# Altium PCB SHDN21-P01-V00.PcbDoc
Units mil, origin at the board's own origin, x right, y up, seen from the top; angles counter-clockwise.
Board outline 6000 x 4000 mil, 2 copper layers (Top Layer, Bottom Layer), stack 61.756 mil thick; 111 components, 82 nets, 355 pads, 24 vias.
Unrouted connection lines stored in the file: 51.
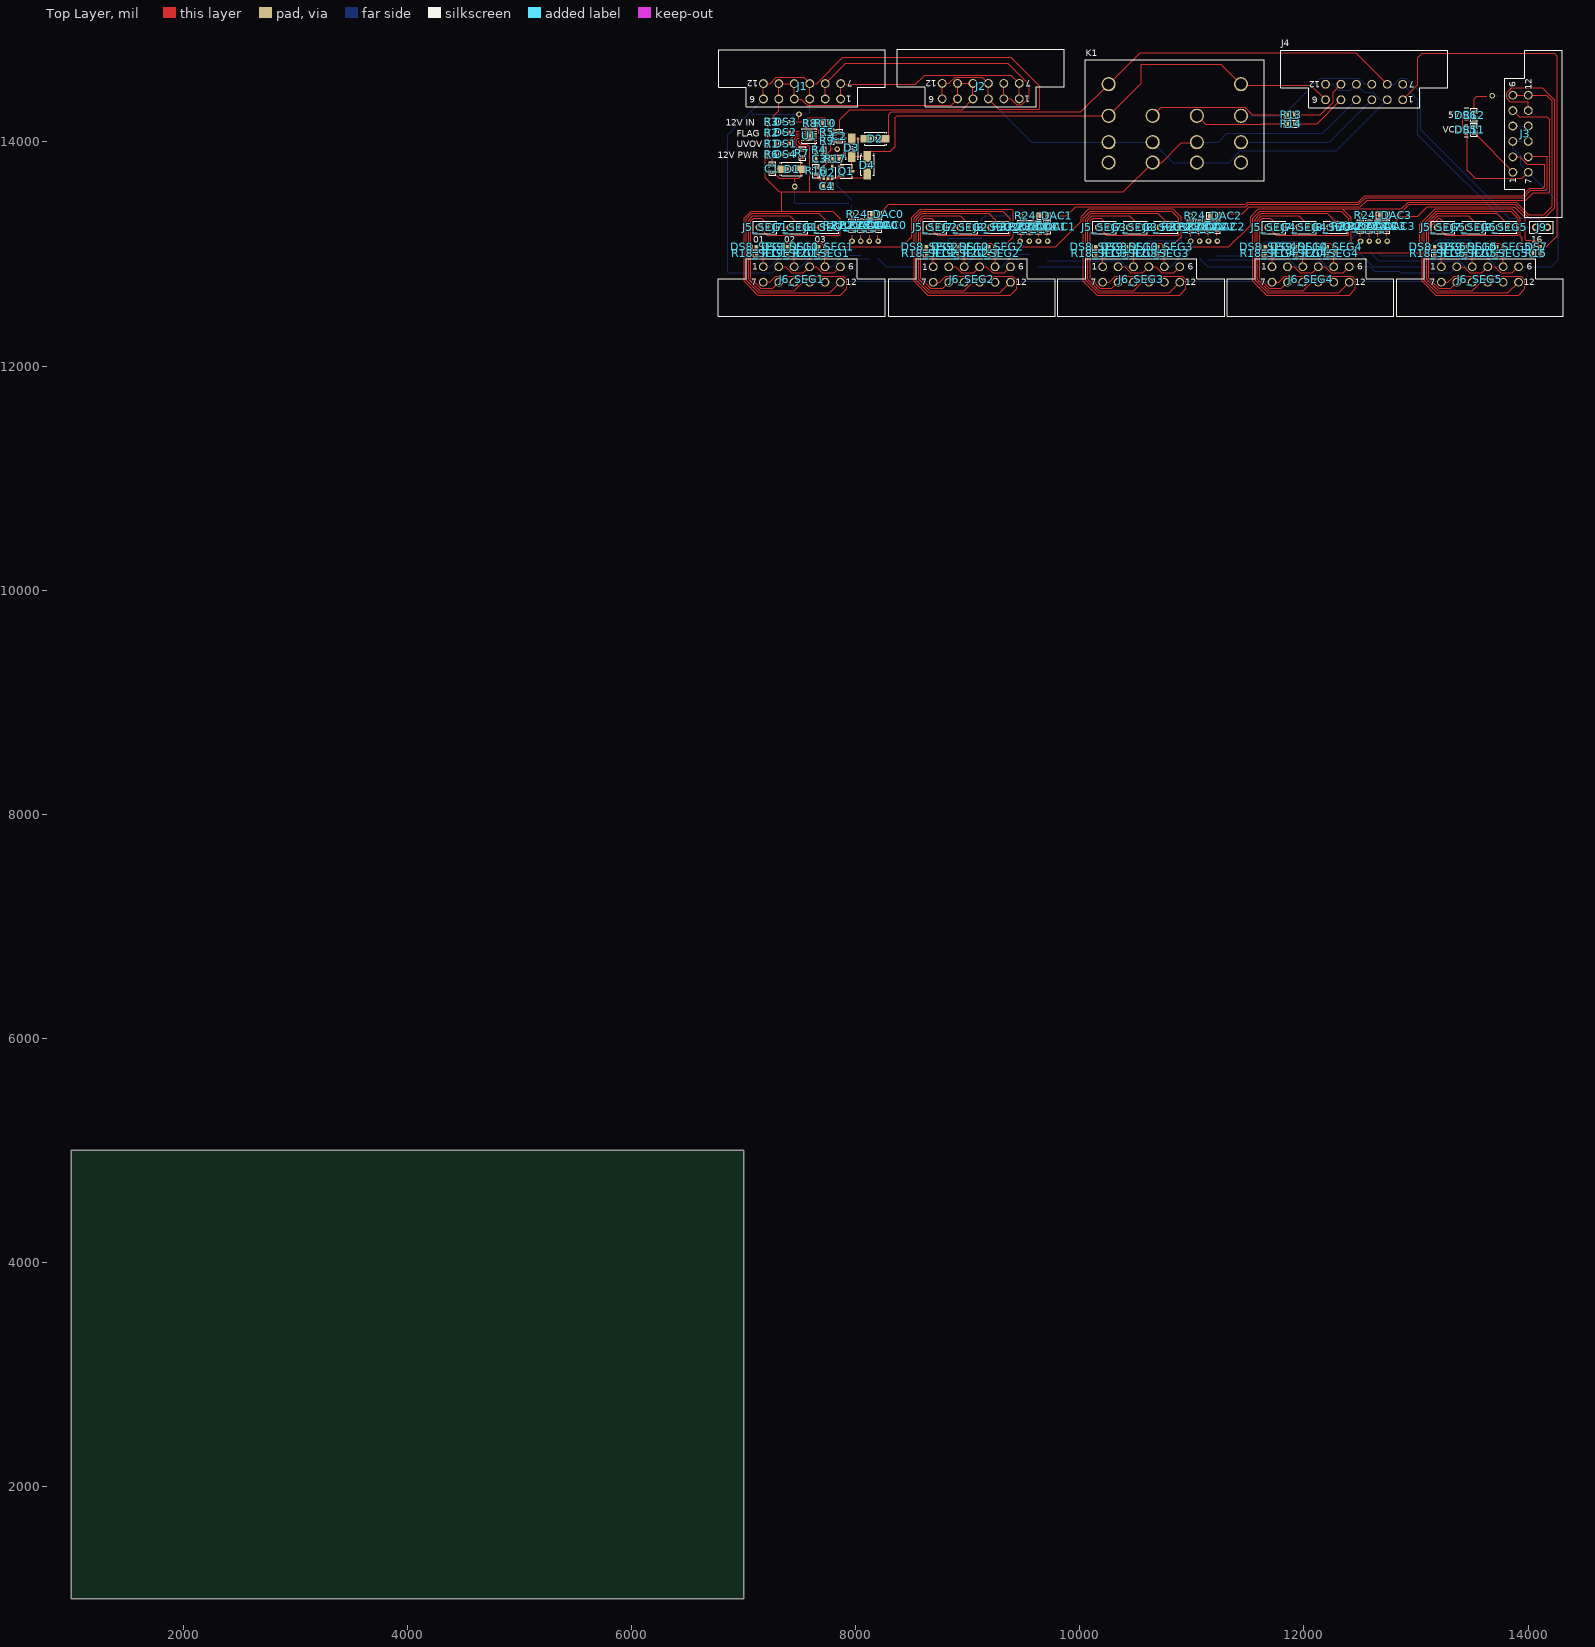
[diagram p0: Top Layer view]
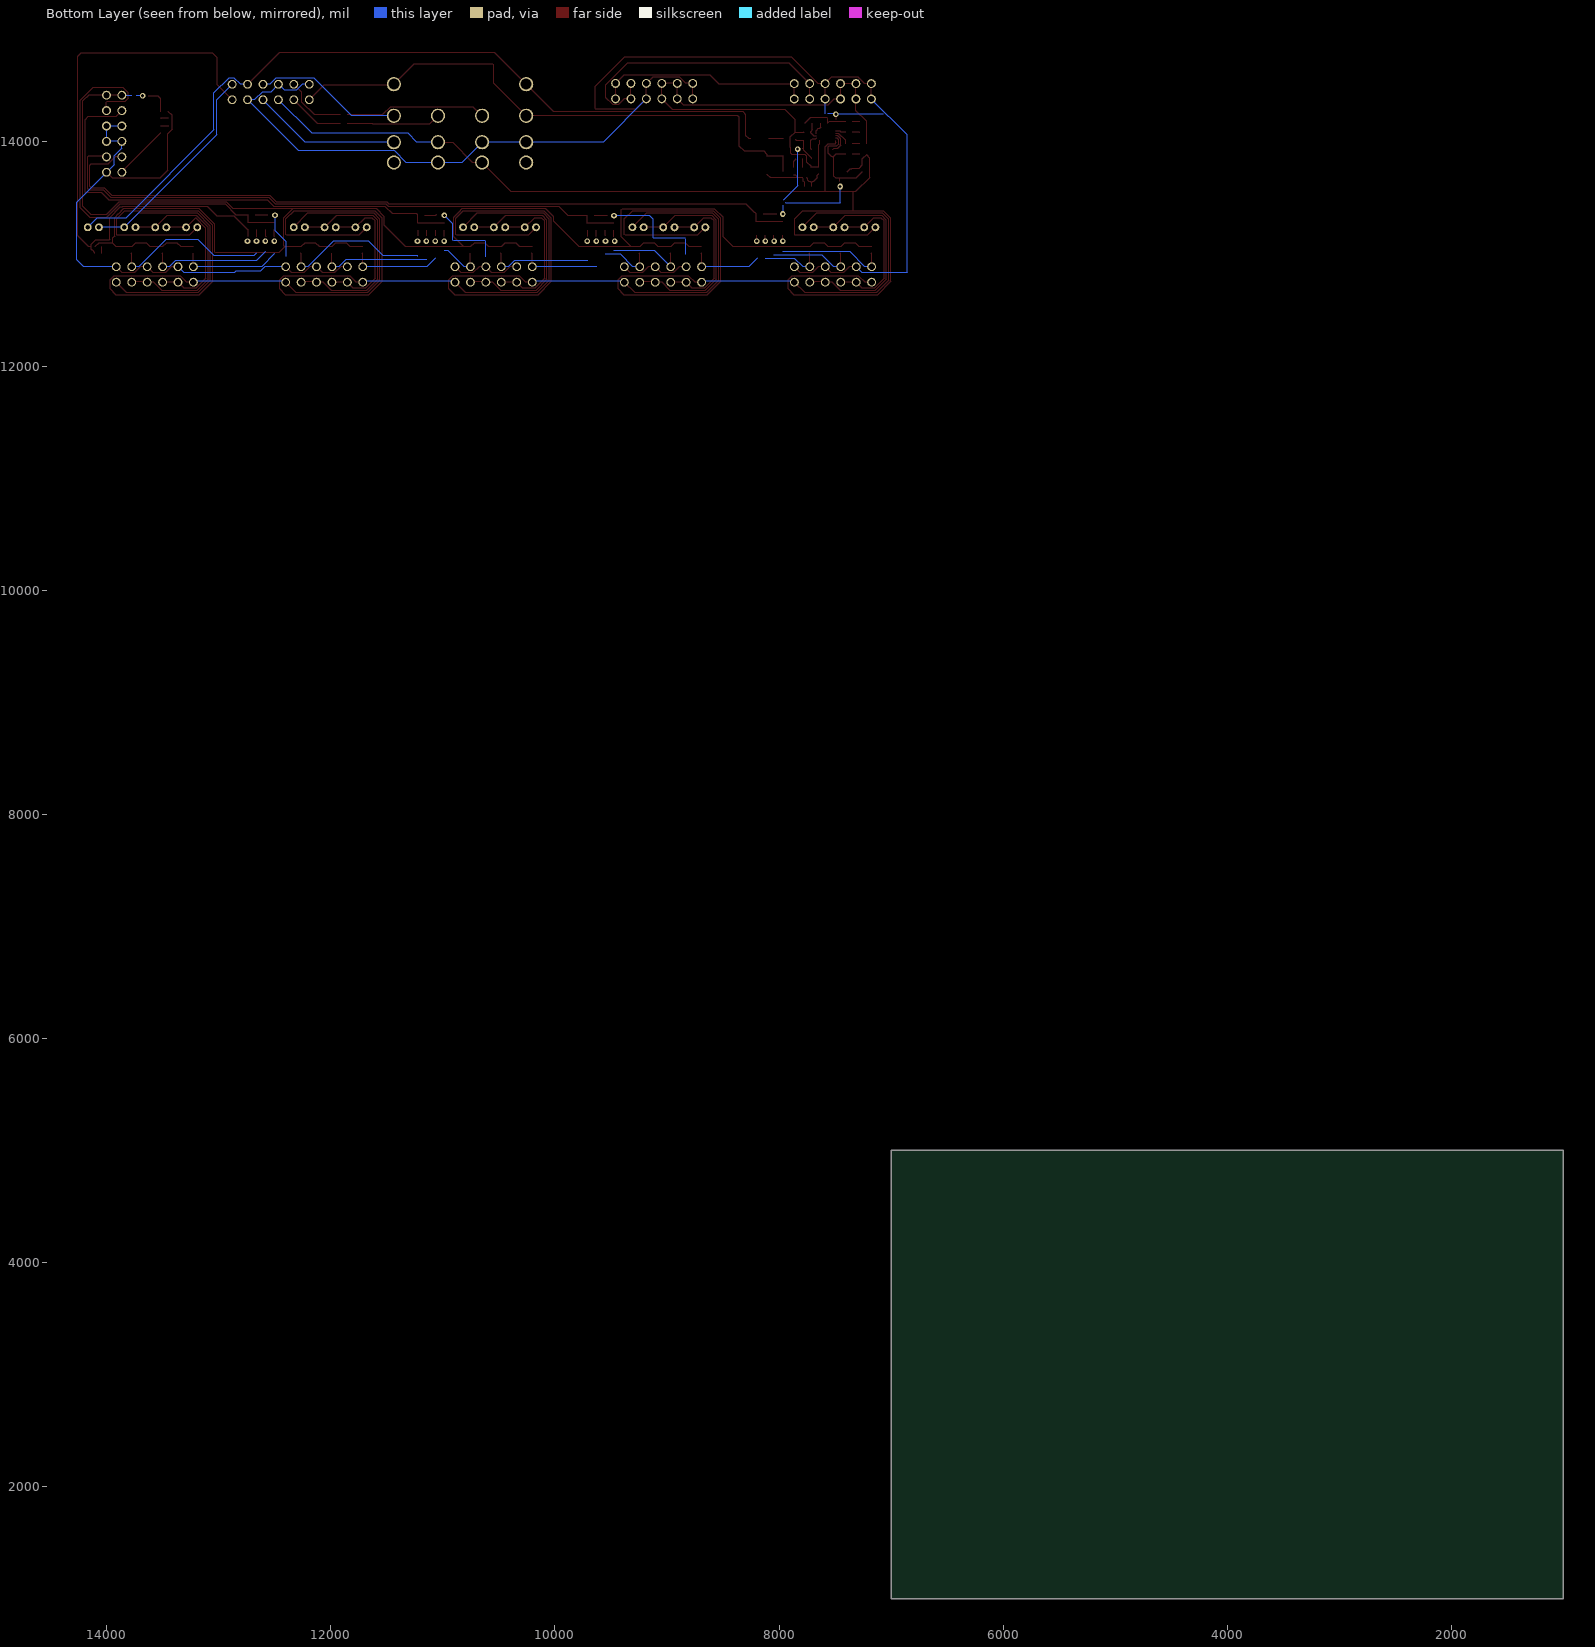
[diagram p1: Bottom Layer view, seen from below]

## Layer stack, top to bottom
Top Solder: solder mask 1, SM-001, Dk 4
Top Layer: signal copper 1.378
Dielectric 1: core 59, Core-043, Dk 4.3
Bottom Layer: signal copper 1.378
Bottom Solder: solder mask 1, SM-001, Dk 4

## Board outline
1000,1000 7000,1000 7000,5000 1000,5000

## Design rules (kind name [scope] priority, off if disabled: settings)
Clearance [All] p1: gap=10 ignorepadtopadclearanceinfootprint=FALSE except(0: Arc-Hole Track-Hole SMDPad-Hole THPad-Hole Via-Hole Fill-Hole Poly-Hole Region-Hole Text-Hole)
PolygonConnect [All] p1: connectstyle=Relief reliefconductorwidth=10 reliefentries=4 polygonreliefangle="90 Angle" airgapwidth=10
RoomDefinition SHDN21-S01-V00-Shutdown [InComponentClass('SHDN21-S01-V00-Shutdown')] p1: confinementstyle=ConfineIn formatcopy=TRUE lockcomponents=FALSE outline 6755.13,12961.61 14334.65,12961.61 14334.65,14846.14 6755.13,14846.14
RoomDefinition DAC2 [InComponentClass('DAC2')] p2: confinementstyle=ConfineIn formatcopy=TRUE lockcomponents=FALSE outline 10944.88,13174.47 11270.67,13174.47 11270.67,13381.89 10944.88,13381.89
RoomDefinition DAC0 [InComponentClass('DAC0')] p3: confinementstyle=ConfineIn formatcopy=TRUE lockcomponents=FALSE outline 7924.72,13184.57 8250.51,13184.57 8250.51,13391.99 7924.72,13391.99
RoomDefinition SEG1 [InComponentClass('SEG1')] p4: confinementstyle=ConfineIn formatcopy=TRUE lockcomponents=FALSE outline 6756.3,12418.31 8282.48,12418.31 8282.48,13411.42 6756.3,13411.42
RoomDefinition SEG2 [InComponentClass('SEG2')] p5: confinementstyle=ConfineIn formatcopy=TRUE lockcomponents=FALSE outline 8273.98,12418.06 9800.16,12418.06 9800.16,13411.17 8273.98,13411.17
RoomDefinition SEG3 [InComponentClass('SEG3')] p6: confinementstyle=ConfineIn formatcopy=TRUE lockcomponents=FALSE outline 9785.43,12418.31 11311.61,12418.31 11311.61,13411.42 9785.43,13411.42
RoomDefinition SEG4 [InComponentClass('SEG4')] p7: confinementstyle=ConfineIn formatcopy=TRUE lockcomponents=FALSE outline 11297.24,12418.31 12823.43,12418.31 12823.43,13411.42 11297.24,13411.42
RoomDefinition SEG5 [InComponentClass('SEG5')] p8: confinementstyle=ConfineIn formatcopy=TRUE lockcomponents=FALSE outline 12809.06,12418.31 14335.24,12418.31 14335.24,13411.42 12809.06,13411.42
RoomDefinition DAC3 [InComponentClass('DAC3')] p9: confinementstyle=ConfineIn formatcopy=TRUE lockcomponents=FALSE outline 12460.41,13176.7 12786.2,13176.7 12786.2,13384.12 12460.41,13384.12
RoomDefinition DAC1 [InComponentClass('DAC1')] p10: confinementstyle=ConfineIn formatcopy=TRUE lockcomponents=FALSE outline 9432.09,13171.52 9757.87,13171.52 9757.87,13378.94 9432.09,13378.94
RoutingVias [All] p1: holewidth=28 width=50 viastyle="Through Hole" minholewidth=28 minwidth=50 maxholewidth=28 maxwidth=50
SolderMaskExpansion [All] p1: expansion=4 istentingtop=FALSE
Width [All] p1: maxlimit=10 minlimit=10 preferedwidth=10
30 further rules are at their usual default settings.

## Classes and differential pairs
channel class SHDN21-S03-V00-DACResistors: DAC0 DAC1 DAC2 DAC3
channel class SHDN21-S02-V00-SegInterface: SEG1 SEG2 SEG3 SEG4 SEG5
component class SHDN21-S01-V00-Shutdown: C1 C2 C3 C4 D1 D2 D3 D4 D? DS1 DS2 DS3 DS4 DS5 DS6 DS7 J1 J2 J3 J4 J9 J? K1 Q1 R1 R2 R3 R4 R5 R6 R7 R8 R9 R10 R11 R12 R13 R14 R15 R16 R17 U1 U2
component class SEG5: DS8_SEG5 DS9_SEG5 DS10_SEG5 J5_SEG5 J6_SEG5 J7_SEG5 J8_SEG5 R18_SEG5 R19_SEG5 R20_SEG5
component class SEG4: DS8_SEG4 DS9_SEG4 DS10_SEG4 J5_SEG4 J6_SEG4 J7_SEG4 J8_SEG4 R18_SEG4 R19_SEG4 R20_SEG4
component class SEG3: DS8_SEG3 DS9_SEG3 DS10_SEG3 J5_SEG3 J6_SEG3 J7_SEG3 J8_SEG3 R18_SEG3 R19_SEG3 R20_SEG3
component class SEG2: DS8_SEG2 DS9_SEG2 DS10_SEG2 J5_SEG2 J6_SEG2 J7_SEG2 J8_SEG2 R18_SEG2 R19_SEG2 R20_SEG2
component class SEG1: DS8_SEG1 DS9_SEG1 DS10_SEG1 J5_SEG1 J6_SEG1 J7_SEG1 J8_SEG1 R18_SEG1 R19_SEG1 R20_SEG1
component class DAC3: R21_DAC3 R22_DAC3 R23_DAC3 R24_DAC3 R25_DAC3
component class DAC2: R21_DAC2 R22_DAC2 R23_DAC2 R24_DAC2 R25_DAC2
component class DAC1: R21_DAC1 R22_DAC1 R23_DAC1 R24_DAC1 R25_DAC1
component class DAC0: R21_DAC0 R22_DAC0 R23_DAC0 R24_DAC0 R25_DAC0

## Components (designator, comment, footprint, x,y, rotation, side; value= is the part's Value field where it differs from the comment)
C1 "4u7 50V 5%" Cap_Ceramic_0603 7255.65,13761.81 r90 top
C2 "470nF 50V 5%" Cap_Ceramic_0603 7855.31,14051.89 r90 top
C3 "100nF 50V 5% 0603" Cap_Ceramic_0603 7676.91,13850.85 r0 top
C4 "1uF 25V 5% 0603" Cap_Ceramic_0603 7741.14,13606.3 r180 top
D1 "1N4448WQ-7-F" SMA 7431.61,13758.63 r180 top
D2 "1N4448WQ-7-F" SMA 8172.3,14028.75 r0 top
D3 "SMAZ12-13-F" SMA 7964.32,13949.33 r270 top
D4 "BZG05C22-M" SMA 8104.33,13792.32 r90 top
DS1 "LED Red 0603" "LED RED 0603" 7376.15,13985.97 r0 top
DS2 "LED Red 0603" "LED RED 0603" 7376.71,14085.38 r0 top
DS3 "LED Green 0603" "LED GREEN 0603" 7376.23,14180.85 r0 top
DS4 "LED Green 0603" "LED GREEN 0603" 7376.15,13890.49 r0 top
DS5 "LED Green 0603" "LED GREEN 0603" 13448.82,14111.22 r270 top
DS6 "LED Green 0603" "LED GREEN 0603" 13449.8,14240.16 r90 top
DS7 "LED Red 0603" "LED RED 0603" 14076.81,13065.24 r180 top
DS8_SEG1 "LED Red 0603" "LED RED 0603" 7145.08,13064.96 r180 top (schematic designator DS8)
DS8_SEG2 "LED Red 0603" "LED RED 0603" 8662.76,13064.71 r180 top (schematic designator DS8)
DS8_SEG3 "LED Red 0603" "LED RED 0603" 10174.21,13064.96 r180 top (schematic designator DS8)
DS8_SEG4 "LED Red 0603" "LED RED 0603" 11686.02,13064.96 r180 top (schematic designator DS8)
DS8_SEG5 "LED Red 0603" "LED RED 0603" 13197.83,13064.96 r180 top (schematic designator DS8)
DS9_SEG1 "LED Red 0603" "LED RED 0603" 7420.67,13064.96 r180 top (schematic designator DS9)
DS9_SEG2 "LED Red 0603" "LED RED 0603" 8938.35,13064.71 r180 top (schematic designator DS9)
DS9_SEG3 "LED Red 0603" "LED RED 0603" 10449.8,13064.96 r180 top (schematic designator DS9)
DS9_SEG4 "LED Red 0603" "LED RED 0603" 11961.61,13064.96 r180 top (schematic designator DS9)
DS9_SEG5 "LED Red 0603" "LED RED 0603" 13473.43,13064.96 r180 top (schematic designator DS9)
DS10_SEG1 "LED Red 0603" "LED RED 0603" 7696.26,13064.96 r180 top (schematic designator DS10)
DS10_SEG2 "LED Red 0603" "LED RED 0603" 9213.94,13064.71 r180 top (schematic designator DS10)
DS10_SEG3 "LED Red 0603" "LED RED 0603" 10725.39,13064.96 r180 top (schematic designator DS10)
DS10_SEG4 "LED Red 0603" "LED RED 0603" 12237.2,13064.96 r180 top (schematic designator DS10)
DS10_SEG5 "LED Red 0603" "LED RED 0603" 13749.02,13064.96 r180 top (schematic designator DS10)
J1 "MX120G" MX120G 7520.41,14383.6 r180 top
J2 "MX120G" MX120G 9115.16,14384.84 r180 top
J3 "MX120G" MX120G 13865.16,14073.82 r90 top
J4 "MX120G" MX120G 12537.4,14376.97 r180 top
J5_SEG1 "Jumper 2Way Pins" Jumper_2Way_Pin 7240.16,13238.19 r0 top (schematic designator J5)
J5_SEG2 "Jumper 2Way Pins" Jumper_2Way_Pin 8757.83,13237.94 r0 top (schematic designator J5)
J5_SEG3 "Jumper 2Way Pins" Jumper_2Way_Pin 10269.29,13238.19 r0 top (schematic designator J5)
J5_SEG4 "Jumper 2Way Pins" Jumper_2Way_Pin 11781.1,13238.19 r0 top (schematic designator J5)
J5_SEG5 "Jumper 2Way Pins" Jumper_2Way_Pin 13292.91,13238.19 r0 top (schematic designator J5)
J6_SEG1 "MX120G" MX120G 7518.74,12887.01 r0 top (schematic designator J6)
J6_SEG2 "MX120G" MX120G 9036.42,12886.77 r0 top (schematic designator J6)
J6_SEG3 "MX120G" MX120G 10547.87,12887.01 r0 top (schematic designator J6)
J6_SEG4 "MX120G" MX120G 12059.68,12887.01 r0 top (schematic designator J6)
J6_SEG5 "MX120G" MX120G 13571.5,12887.01 r0 top (schematic designator J6)
J7_SEG1 "Jumper 2Way Pins" Jumper_2Way_Pin 7515.75,13238.19 r0 top (schematic designator J7)
J7_SEG2 "Jumper 2Way Pins" Jumper_2Way_Pin 9033.43,13237.94 r0 top (schematic designator J7)
J7_SEG3 "Jumper 2Way Pins" Jumper_2Way_Pin 10544.88,13238.19 r0 top (schematic designator J7)
J7_SEG4 "Jumper 2Way Pins" Jumper_2Way_Pin 12056.69,13238.19 r0 top (schematic designator J7)
J7_SEG5 "Jumper 2Way Pins" Jumper_2Way_Pin 13568.5,13238.19 r0 top (schematic designator J7)
J8_SEG1 "Jumper 2Way Pins" Jumper_2Way_Pin 7791.34,13239.17 r0 top (schematic designator J8)
J8_SEG2 "Jumper 2Way Pins" Jumper_2Way_Pin 9309.02,13238.93 r0 top (schematic designator J8)
J8_SEG3 "Jumper 2Way Pins" Jumper_2Way_Pin 10820.47,13239.17 r0 top (schematic designator J8)
J8_SEG4 "Jumper 2Way Pins" Jumper_2Way_Pin 12332.28,13239.17 r0 top (schematic designator J8)
J8_SEG5 "Jumper 2Way Pins" Jumper_2Way_Pin 13844.09,13239.17 r0 top (schematic designator J8)
J9 "Jumper 2Way Pins" Jumper_2Way_Pin 14170.61,13238.46 r0 top
K1 "LY4-0-DC12" LY4-0-DC12 10256.89,13816.93 r0 top
Q1 "2N7002K" SOT-23-3 7914.68,13739.38 r0 top
R1 "4k7 5% 0603" Res_ThinFilm_0603 7250.64,13985.97 r180 top
R2 "4k7 5% 0603" Res_ThinFilm_0603 7250.72,14084.39 r180 top
R3 "4k7 5% 0603" Res_ThinFilm_0603 7250.72,14180.12 r180 top
R4 "2M2 1%" Res_ThinFilm_0603 7675.54,13928.86 r180 top
R5 "2M2 1%" Res_ThinFilm_0603 7747.3,14088.56 r0 top
R6 "4k7 5% 0603" Res_ThinFilm_0603 7250.64,13889.51 r180 top
R7 "2k7 5% 0603" Res_ThinFilm_0603 7523.62,13898.62 r270 top
R8 "150k 5% 0603" Res_ThinFilm_0603 7595.56,14166.57 r0 top
R9 "390k 5%" Res_ThinFilm_0603 7747.3,14010.55 r180 top
R10 "240k 5%" Res_ThinFilm_0603 7733.57,14167.29 r180 top
R11 "4k7 5% 0603" Res_ThinFilm_0603 13518.7,14109.25 r270 top
R12 "4k7 5% 0603" Res_ThinFilm_0603 13518.81,14240.16 r90 top
R13 "4k7 5% 0603" Res_ThinFilm_0603 11884.84,14242.13 r0 top
R14 "4k7 5% 0603" Res_ThinFilm_0603 11885.83,14163.39 r0 top
R15 "470R 5% 0603" Res_ThinFilm_0603 14075.53,13007.87 r180 top
R16 "2M2 1% 0603" Res_ThinFilm_0603 7645.67,13742.58 r90 top
R17 "100R 5% 0603" Res_ThinFilm_0603 7819.88,13851.38 r0 top
R18_SEG1 "470R 5% 0603" Res_ThinFilm_0603 7146.36,13007.6 r180 top (schematic designator R18)
R18_SEG2 "470R 5% 0603" Res_ThinFilm_0603 8664.04,13007.35 r180 top (schematic designator R18)
R18_SEG3 "470R 5% 0603" Res_ThinFilm_0603 10175.5,13007.6 r180 top (schematic designator R18)
R18_SEG4 "470R 5% 0603" Res_ThinFilm_0603 11687.31,13007.6 r180 top (schematic designator R18)
R18_SEG5 "470R 5% 0603" Res_ThinFilm_0603 13199.12,13007.6 r180 top (schematic designator R18)
R19_SEG1 "470R 5% 0603" Res_ThinFilm_0603 7421.97,13006.89 r180 top (schematic designator R19)
R19_SEG2 "470R 5% 0603" Res_ThinFilm_0603 8939.65,13006.64 r180 top (schematic designator R19)
R19_SEG3 "470R 5% 0603" Res_ThinFilm_0603 10451.1,13006.89 r180 top (schematic designator R19)
R19_SEG4 "470R 5% 0603" Res_ThinFilm_0603 11962.91,13006.89 r180 top (schematic designator R19)
R19_SEG5 "470R 5% 0603" Res_ThinFilm_0603 13474.72,13006.89 r180 top (schematic designator R19)
R20_SEG1 "470R 5% 0603" Res_ThinFilm_0603 7697.56,13006.89 r180 top (schematic designator R20)
R20_SEG2 "470R 5% 0603" Res_ThinFilm_0603 9215.24,13006.64 r180 top (schematic designator R20)
R20_SEG3 "470R 5% 0603" Res_ThinFilm_0603 10726.69,13006.89 r180 top (schematic designator R20)
R20_SEG4 "470R 5% 0603" Res_ThinFilm_0603 12238.5,13006.89 r180 top (schematic designator R20)
R20_SEG5 "470R 5% 0603" Res_ThinFilm_0603 13750.32,13006.89 r180 top (schematic designator R20)
R21_DAC0 "4k7 5% 0603" Res_ThinFilm_0603 7968.25,13255.18 r90 top (schematic designator R21)
R21_DAC1 "4k7 5% 0603" Res_ThinFilm_0603 9475.62,13242.13 r90 top (schematic designator R21)
R21_DAC2 "4k7 5% 0603" Res_ThinFilm_0603 10988.41,13245.08 r90 top (schematic designator R21)
R21_DAC3 "4k7 5% 0603" Res_ThinFilm_0603 12503.94,13247.31 r90 top (schematic designator R21)
R22_DAC0 "10k 5% 0603" Res_ThinFilm_0603 8046.26,13255.18 r90 top (schematic designator R22)
R22_DAC1 "10k 5% 0603" Res_ThinFilm_0603 9553.63,13242.13 r90 top (schematic designator R22)
R22_DAC2 "10k 5% 0603" Res_ThinFilm_0603 11066.42,13245.08 r90 top (schematic designator R22)
R22_DAC3 "10k 5% 0603" Res_ThinFilm_0603 12581.95,13247.31 r90 top (schematic designator R22)
R23_DAC0 "22k 5% 0603" Res_ThinFilm_0603 8124.27,13255.18 r90 top (schematic designator R23)
R23_DAC1 "22k 5% 0603" Res_ThinFilm_0603 9631.64,13242.13 r90 top (schematic designator R23)
R23_DAC2 "22k 5% 0603" Res_ThinFilm_0603 11144.43,13245.08 r90 top (schematic designator R23)
R23_DAC3 "22k 5% 0603" Res_ThinFilm_0603 12659.96,13247.31 r90 top (schematic designator R23)
R24_DAC0 "2k7 5% 0603" Res_ThinFilm_0603 8171.77,13353.61 r0 top (schematic designator R24)
R24_DAC1 "2k7 5% 0603" Res_ThinFilm_0603 9679.13,13340.55 r0 top (schematic designator R24)
R24_DAC2 "2k7 5% 0603" Res_ThinFilm_0603 11191.93,13343.5 r0 top (schematic designator R24)
R24_DAC3 "2k7 5% 0603" Res_ThinFilm_0603 12707.46,13345.73 r0 top (schematic designator R24)
R25_DAC0 "47k 5% 0603" Res_ThinFilm_0603 8202.28,13255.18 r90 top (schematic designator R25)
R25_DAC1 "47k 5% 0603" Res_ThinFilm_0603 9709.65,13242.13 r90 top (schematic designator R25)
R25_DAC2 "47k 5% 0603" Res_ThinFilm_0603 11222.44,13245.08 r90 top (schematic designator R25)
R25_DAC3 "47k 5% 0603" Res_ThinFilm_0603 12737.97,13247.31 r90 top (schematic designator R25)
U1 "MAX17612A" "10-Pin TDFN EP" 7582.77,14014.27 r90 top
U2 "BU4S584G2" SSOP5 7789.37,13774.08 r180 top

## Footprints (in the part's own frame and the unit in brackets; to place one, negate y for a bottom-side part, rotate by r counter-clockwise, add the part's x,y. Pads: shape width x height; smd on the part's side, far side on the other; paste and mask are expansions set on the pad)
"10-Pin TDFN EP" [mm]
  rect 0.25x0.7 smd: 1(0,-1.425) 2(0.5,-1.425) 3(1,-1.425) 4(1.5,-1.425) 5(2,-1.425) 6(2,1.425) 7(1.5,1.425) 8(1,1.425) 9(0.5,1.425) 10(0,1.425)
  rect 2.38x1.65 smd: 11(1,0)
  silkscreen extent -0.9,-1.7 2.6,1.7
Cap_Ceramic_0603 [mil]
  rect 30x40 smd: 1(-31.24,0) 2(31.24,0)
  silkscreen extent -60,-30 60,30, body extent -31,-16 32,16, height 33
Jumper_2Way_Pin [mil]
  round 70 hole 40: 1(-100,0) 2(0,0)
  silkscreen extent -155,-55 55,55, body extent -142,-48 42,47, height 332
"LED GREEN 0603" [mil]
  rect 35x35 smd: 1(-30,0) 2(30,0)
  silkscreen extent 65,-20 65,20, body extent -40,-20 40,20, height 30
"LED RED 0603" [mil]
  rect 35x35 smd: 1(-30,0) 2(30,0)
  silkscreen extent 65,-20 65,20, body extent -40,-20 40,20, height 30
LY4-0-DC12 [mm]
  round 3.2 hole 2.5: 1(0,0) 2(10,0) 3(20,0) 4(30,0) 5(0,4.6) 6(10,4.6) 7(20,4.6) 8(30,4.6) 9(0,10.6) 10(10,10.6) 11(20,10.6) 12(30,10.6) 13(0,17.75) 14(30,17.75)
  silkscreen extent -5.3,-4.1 35.3,23.25
MX120G [mm]
  round 2 hole 1.45: 1(-8.75,0) 2(-5.25,0) 3(-1.75,0) 4(1.75,0) 5(5.25,0) 6(8.75,0) 7(-8.75,-3.5) 8(-5.25,-3.5) 9(-1.75,-3.5) 10(1.75,-3.5) 11(5.25,-3.5) 12(8.75,-3.5)
  round 0 hole 4 mask+0.254: NC(-15.75,-5.7) NC(15.75,-5.7)
  silkscreen extent -18.9,-11.2 18.9,1.8
Res_ThinFilm_0603 [mil]
  rect 30x40 smd: 1(-31.24,0) 2(31.24,0)
  silkscreen extent -60,-30 60,30, body extent -31,-16 32,16, height 18
SMA [mm]
  rect 2.5x1.7 smd: A(-2,0) K(2,0)
  silkscreen extent -2.3,-1.52 2.67,1.52, body extent -2.52,-1.46 2.52,1.46, height 2.4
SOT-23-3 [mm]
  rect 1.4x0.6 smd: D(1.2,0) G(-1.2,0.95) S(-1.2,-0.95)
  silkscreen extent -1.4,-1.6 1.4,1.6, body extent -1.2,-1.45 1.2,1.45, height 1
SSOP5 [mm]
  rect 0.6x1 smd: 1(1.9,2.4) 2(0.95,2.4) 3(0,2.4) 4(0,0) 5(1.9,0)
  silkscreen extent -0.8,0 2.7,2.4

## Part data
C1: library part "4u7 50V 5% X7R 0603", "Capacitor, Ceramic, SMD, 4u7, 50V, 5%, X7R, 0603"
C2: library part "470nF 50V 5% X7R 0603", "Capacitor, Ceramic, SMD, 470nF, 50V, 5%, X7R, 0603"
C3: library part "100nF 50V 5% X7R 0603", "Capacitor, Ceramic, SMD, 100nF, 50V, 5%, X7R, 0603"
C4: library part "1uF 25V 5% X7R 0603", "Capacitor, Ceramic, SMD, 1uF, 25V, 5%, X7R, 0603"
D1 D2: "Diode, SMD, 75V, 5%, 250mA, SOD123", Average Rectified Current=150mA, Forward Voltage=1V, Manufacturer="ON Semiconductor / Fairchild", Manufacturer Part Number=1N914BWS, Max Forward Surge Current (Ifsm)=4A, Max Operating Temperature=150°C, Max Repetitive Reverse Voltage (Vrrm)=75V, Max Reverse Leakage Current=5uA, Min Operating Temperature=-55°C, Package Quantity=1, Power Dissipation=200mW, Category="Rectifier Diodes", Contact Plating=Tin,Matte, Element Configuration=Single, Forward Current=150mA, Height=1mm, Lead Free="Lead Free", Length=1.8mm, Max Reverse Voltage (DC)=75V, Mount="Surface Mount", Number of Pins=2, Packaging="Tape and Reel", Peak Reverse Current=5uA, Radiation Hardening=No, REACH SVHC="No SVHC", Recovery Time=4ns, Reverse Recovery Time=4ns, Reverse Voltage=75V, Weight=0.0276g, Width=1.35mm
D3: "Zener Diode 12V 1W ±5% Surface Mount SMA", Manufacturer="ON Semiconductor", MPN=MM3Z56VB, ComponentLink1Description=Digikey, ComponentLink1URL=https://www.digikey.com.au/product-detail/en/diodes-incorporated/SMAZ12-13-F/SMAZ12-FDICT-ND/725073, ComponentLink2Description=Datasheet, ComponentLink2URL=https://www.diodes.com/assets/Datasheets/ds18015.pdf
D4: "Zener Diodes Uni-direc 40W Pppm SMA (DO-214AC)", ComponentLink1Description=Datasheet, ComponentLink1URL=https://au.mouser.com/datasheet/2/427/bzg05c-m-series-1767829.pdf
J1 J2 J3 J4 J6_SEG1 J6_SEG2 J6_SEG3 J6_SEG4 J6_SEG5: "MX120G with standard connector layout"
J5_SEG1 J5_SEG2 J5_SEG3 J5_SEG4 J5_SEG5 J7_SEG1 J7_SEG2 J7_SEG3 J7_SEG4 J7_SEG5 J8_SEG1 J8_SEG2 J8_SEG3 J8_SEG4 J8_SEG5 J9: library part "Jumper 2Way Vert Pins", "Jumper 2Way Vert Pins"
K1: "RELAY GEN PURPOSE 4PDT 10A 12V Through-hole"
Q1: "N-Channel 60V 300mA (Ta) 350mW (Ta) Surface Mount SOT-23 (TO-236AB)"
R1 R2 R3 R6 R11 R12 R13 R14 R21_DAC0 R21_DAC1 R21_DAC2 R21_DAC3: "Resistor, SMD, 4k7, 0.1W, 5%, 0603"
R4 R5: library part "2M2 1% 0603", "Resistor, SMD, 2M2, 0.125W, 1%, 0603"
R7 R24_DAC0 R24_DAC1 R24_DAC2 R24_DAC3: "Resistor, SMD, 2k7, 0.1W, 5%, 0603"
R8: library part "150k 5%, 0603", "Resistor, SMD, 150k, 0.1W, 5%, 0603"
R9: library part "390k 5% 0603", "Resistor, SMD, 390k, 0.1W, 5%, 0603"
R10: library part "240k 5% 0603", "Resistor, SMD, 240k, 0.1W, 5%, 0603"
R15 R18_SEG1 R18_SEG2 R18_SEG3 R18_SEG4 R18_SEG5 R19_SEG1 R19_SEG2 R19_SEG3 R19_SEG4 R19_SEG5 R20_SEG1 R20_SEG2 R20_SEG3 R20_SEG4 R20_SEG5: "Resistor, SMD, 470R, 0.1W, 5%, 0603"
R16: "Resistor, SMD, 2M2, 0.125W, 1%, 0603"
R17: library part "100R 5%, 0603", "Resistor, SMD, 100R, 0.1W, 5%, 0603"
R22_DAC0 R22_DAC1 R22_DAC2 R22_DAC3: "Resistor, SMD, 10k, 0.1W, 5%, 0603"
R23_DAC0 R23_DAC1 R23_DAC2 R23_DAC3: "Resistor, SMD, 22k, 0.1W, 5%, 0603"
R25_DAC0 R25_DAC1 R25_DAC2 R25_DAC3: "Resistor, SMD, 47k, 0.1W, 5%, 0603"
U2: "IC INVERTER SCHMITT 1CH 5SSOP"

## Via types
v1: diameter 50, hole 28, Top Layer to Bottom Layer, 24 vias

## Nets (pads, with @x,y where several pads share a name; then routed paths per layer and width w, separated by ;. In a path a pad name is that pad's centre, name@x,y a point inside that pad or via, vN(x,y) a via of type N, cw(c..) or ccw(c..) an arc to the next point about the centre after c; other vN are vias at no path point)
5V: DS7.1 DS8_SEG1.1 DS8_SEG2.1 DS8_SEG3.1 DS8_SEG4.1 DS8_SEG5.1 DS9_SEG1.1 DS9_SEG2.1 DS9_SEG3.1 DS9_SEG4.1 DS9_SEG5.1 DS10_SEG1.1 DS10_SEG2.1 DS10_SEG3.1 DS10_SEG4.1 DS10_SEG5.1 J3.6 J3.12 R12.2 | length 15845
  Top Layer w10: DS8_SEG1.1 7284.73,13064.96 7317.23,13097.46 7418.17,13097.46 DS9_SEG1.1 7560.32,13064.96 7592.82,13097.46 7693.76,13097.46 DS10_SEG1.1 8408.46,13064.96 8499.02,13155.51 8499.02,13326.51 8574.46,13401.96 9398.29,13401.96 9406.5,13393.75 9406.5,13152.56 9318.65,13064.71 ; DS8_SEG2.1 8802.41,13064.71 8834.91,13097.21 8935.85,13097.21 DS9_SEG2.1 9078,13064.71 9110.5,13097.21 9211.44,13097.21 DS10_SEG2.1 9318.65,13064.71 ; DS8_SEG3.1 10313.86,13064.96 10346.36,13097.46 10447.3,13097.46 DS9_SEG3.1 10589.46,13064.96 10621.96,13097.46 10722.89,13097.46 DS10_SEG3.1 10812.99,13064.96 ; DS8_SEG4.1 11825.68,13064.96 11858.18,13097.46 11959.11,13097.46 DS9_SEG4.1 12101.27,13064.96 12133.77,13097.46 12234.7,13097.46 DS10_SEG4.1 12412.4,13064.96 ; DS8_SEG5.1 13337.49,13064.96 13369.99,13097.46 13470.93,13097.46 DS9_SEG5.1 13613.08,13064.96 13645.58,13097.46 13746.52,13097.46 DS10_SEG5.1 13914.63,13064.96 13947.41,13097.74 ; R12.2 13518.81,14385.94 13542.32,14409.45 13627.95,14409.45 13629.92,14407.48 ; J3.6 J3.12 14163.65,14418.31 14215.55,14366.4 14215.55,13427.17 14140.75,13352.36 14004.92,13352.36 13895.08,13462.2 12929.72,13462.2 12869.72,13402.2 12342.22,13402.2 ; DS7.1 14074.31,13097.74 13947.41,13097.74 ; 9318.65,13064.71 9785.5,13064.71 10012.13,13291.34 10012.13,13332.99 10081.34,13402.2 10830.41,13402.2 10858.6,13374.02 10860.24,13374.02 10904.53,13329.72 10904.53,13156.5 10812.99,13064.96 ; 10812.99,13064.96 11331.02,13064.96 11523.94,13257.87 11523.94,13334.96 11591.18,13402.2 12342.22,13402.2 ; 12342.22,13402.2 12362.54,13381.89 12363.19,13381.89 12422.24,13322.83 12422.24,13074.8 12412.4,13064.96 ; 12412.4,13064.96 12467.52,13009.84 13029.89,13009.84 13035.75,13015.7 13035.75,13264.87 13173.08,13402.2 13854.03,13402.2 13899.94,13356.3 13900.59,13356.3 13930.8,13326.09 13930.8,13160.74 13947.41,13144.13 13947.41,13097.74
  Bottom Layer w10: 13779.53,14411.42 13858.27,14411.42 J3.6
12V: C2.2 C3.1 J1.4 J1.5 J1.10 J1.11 J2.4 J2.5 J2.10 J2.11 R1.2 R2.2 R3.2 R4.2 R5.2 R16.2 U1.1 U2.5 | length 5001.3
  Top Layer w10: R1.2 7219.49,13986.05 R2.2 R3.2 7219.49,14185.12 7313.72,14279.35 J1.5 J1.11 7431.51,14521.4 7451.51,14501.4 J1.4 7512.42,14383.6 7566.79,14329.23 8852.86,14329.23 J2.5 J2.11 J2.10 J2.4 8949.8,14288.39 7945.87,14288.39 7855.31,14197.83 C2.2 ; U1.1 7638.95,14014.19 7638.95,13981.7 7644.3,13976.35 R4.2 7644.3,13852.22 C3.1 ; C3.1 R16.2 7714.31,13773.82 U2.5 7714.57,13781.95 7751.31,13818.7 7751.31,13870.73 7751.79,13870.73 7767.43,13886.38 7880.47,13886.38 7893.7,13899.61 7893.7,13948.77 7898.62,13953.69 7898.62,14044.82 7860.31,14083.13 C2.2 ; R5.2 7783.97,14083.13 C2.2
12VSW: J3.1 R11.2 | length 495.1
  Top Layer w10: R11.2 13523.7,14078.02 13865.16,13736.56 J3.1
ADC0: J3.2 R21_DAC0.2 R22_DAC0.2 R23_DAC0.2 R24_DAC0.2 R25_DAC0.2 | length 6861.1
  Top Layer w10: R21_DAC0.2 R23_DAC0.2 R25_DAC0.2 8202.28,13352.88 R24_DAC0.2 8203,13358.61 8213,13368.61 8218,13368.61 8292.31,13442.91 11477.24,13442.91 11496.53,13462.2 11575.39,13462.2 11575.79,13462.6 12483.25,13462.6 12542.86,13522.2 13952.35,13522.2 14017.62,13587.48 14132.44,13587.48 14151.26,13606.3 14151.26,13793.35 14145.4,13799.21 13993.98,13799.21 13926.06,13867.13 J3.2
ADC1: J3.8 R21_DAC1.2 R22_DAC1.2 R23_DAC1.2 R24_DAC1.2 R25_DAC1.2 | length 5318.1
  Top Layer w10: R21_DAC1.2 R22_DAC1.2 R23_DAC1.2 R25_DAC1.2 9710.37,13274.09 R24_DAC1.2 9879.89,13340.55 9961.54,13422.2 11484.81,13422.2 11504.81,13442.2 12491.14,13442.2 12551.14,13502.2 13960.63,13502.2 14025.91,13567.48 14154.53,13567.48 14171.26,13584.21 14171.26,13866.19 14165.4,13872.05 14007.87,13872.05 J3.8
ADC2: J3.5 R21_DAC2.2 R22_DAC2.2 R23_DAC2.2 R24_DAC2.2 R25_DAC2.2 | length 4369.3
  Top Layer w10: R21_DAC2.2 R22_DAC2.2 R23_DAC2.2 R25_DAC2.2 11223.17,13277.04 R24_DAC2.2 11223.17,13348.5 11233.17,13358.5 11449.4,13358.5 11513.1,13422.2 12504.88,13422.2 12564.88,13482.2 13980.24,13482.2 14045.51,13547.48 14187.06,13547.48 14192.91,13553.34 14192.91,14200.79 14168.31,14225.39 13920.28,14225.39 J3.5
ADC3: J3.11 R21_DAC3.2 R22_DAC3.2 R23_DAC3.2 R24_DAC3.2 R25_DAC3.2 | length 3716.8
  Top Layer w10: R21_DAC3.2 R22_DAC3.2 R23_DAC3.2 R25_DAC3.2 12738.69,13279.27 R24_DAC3.2 12844.34,13345.73 12940.82,13442.2 13886.28,13442.2 14006.63,13321.85 14149.61,13321.85 14239.17,13411.42 14239.17,14371.06 14125,14485.24 13855.2,14485.24 13810.79,14440.83 13810.79,14389.02 13838.58,14361.22 13998.08,14361.22 14003.94,14355.36 14003.94,14281.5 J3.11
AIR: J4.9 K1.12 | length 1329.5
  Bottom Layer w10: K1.12 11812.76,14234.25 12147.64,14569.13 12491.02,14569.13 12545.4,14514.76 J4.9
"AIR LO": J4.3 K1.8 | length 1325.3
  Bottom Layer w10: K1.8 12227.36,13998.03 J4.3
CANH: J1.2 J1.8 J2.2 J2.8 | length 2640.5
  Top Layer w10: J1.2 J1.8 7908.69,14702.99 9356.18,14702.99 9546.26,14512.91 9546.26,14394.57 9482.17,14330.47 9437.12,14330.47 9382.75,14384.84 J2.2 J2.8
CANL: J1.1 J1.7 J2.1 J2.7 | length 1938.4
  Top Layer w10: J1.1 J1.7 7872.02,14514.27 8532.67,14514.27 8615.4,14597.01 9385.28,14597.01 J2.7 J2.1
"CHAIN 1_SEG1": J5_SEG1.2 J6_SEG1.8 J6_SEG1.9 J7_SEG1.1 | length 1356.1
  Top Layer w10: J6_SEG1.8 7257.68,12694.85 7151.73,12694.85 7062.99,12783.59 7062.99,13295.28 7088.58,13320.87 7157.48,13320.87 J5_SEG1.2 J7_SEG1.1 ; J6_SEG1.8@7314.88,12752.05 7317.71,12749.22 7444.18,12749.22 J6_SEG1.9@7449.84,12754.88
"CHAIN 1_SEG2": J5_SEG2.2 J6_SEG2.8 J6_SEG2.9 J7_SEG2.1 | length 1356.1
  Top Layer w10: J6_SEG2.8 8775.35,12694.6 8669.41,12694.6 8580.67,12783.34 8580.67,13295.03 8606.26,13320.62 8675.16,13320.62 J5_SEG2.2 J7_SEG2.1 ; J6_SEG2.8@8832.56,12751.8 8835.39,12748.97 8961.86,12748.97 J6_SEG2.9@8967.52,12754.64
"CHAIN 1_SEG3": J5_SEG3.2 J6_SEG3.8 J6_SEG3.9 J7_SEG3.1 | length 1356.1
  Top Layer w10: J6_SEG3.8 10286.81,12694.85 10180.86,12694.85 10092.13,12783.59 10092.13,13295.28 10117.72,13320.87 10186.61,13320.87 J5_SEG3.2 J7_SEG3.1 ; J6_SEG3.8@10344.01,12752.05 10346.84,12749.22 10473.31,12749.22 J6_SEG3.9@10478.98,12754.88
"CHAIN 1_SEG4": J5_SEG4.2 J6_SEG4.8 J6_SEG4.9 J7_SEG4.1 | length 1356.1
  Top Layer w10: J6_SEG4.8 11798.62,12694.85 11692.68,12694.85 11603.94,12783.59 11603.94,13295.28 11629.53,13320.87 11698.43,13320.87 J5_SEG4.2 J7_SEG4.1 ; J6_SEG4.8@11855.82,12752.05 11858.66,12749.22 11985.12,12749.22 J6_SEG4.9@11990.79,12754.88
"CHAIN 1_SEG5": J5_SEG5.2 J6_SEG5.8 J6_SEG5.9 J7_SEG5.1 | length 1317.5
  Top Layer w10: J6_SEG5.8 13310.43,12694.85 13204.49,12694.85 13115.75,12783.59 13115.75,13231.73 13203.16,13319.14 13211.96,13319.14 J5_SEG5.2 J7_SEG5.1 ; J6_SEG5.8@13367.63,12752.05 13370.47,12749.22 13496.93,12749.22 J6_SEG5.9@13502.6,12754.88
"CHAIN 2_SEG1": J6_SEG1.10 J6_SEG1.11 J7_SEG1.2 J8_SEG1.1 | length 1990.4
  Top Layer w10: J6_SEG1.10 7526.73,12749.22 7451.73,12674.21 7144.08,12674.21 7042.99,12775.3 7042.99,13303.56 7080.3,13340.87 7413.07,13340.87 J7_SEG1.2 7516.24,13238.68 7690.85,13238.68 J8_SEG1.1 ; J6_SEG1.10@7587.64,12754.88 J6_SEG1.11@7725.43,12754.88
"CHAIN 2_SEG2": J6_SEG2.10 J6_SEG2.11 J7_SEG2.2 J8_SEG2.1 | length 1990.4
  Top Layer w10: J6_SEG2.10 9044.41,12748.97 8969.4,12673.97 8661.76,12673.97 8560.67,12775.06 8560.67,13303.31 8597.98,13340.62 8930.75,13340.62 J7_SEG2.2 9033.92,13238.43 9208.52,13238.43 J8_SEG2.1 ; J6_SEG2.10@9105.31,12754.64 J6_SEG2.11@9243.11,12754.64
"CHAIN 2_SEG3": J6_SEG3.10 J6_SEG3.11 J7_SEG3.2 J8_SEG3.1 | length 1990.4
  Top Layer w10: J6_SEG3.10 10555.87,12749.22 10480.86,12674.21 10173.22,12674.21 10072.13,12775.3 10072.13,13303.56 10109.43,13340.87 10442.2,13340.87 J7_SEG3.2 10545.37,13238.68 10719.98,13238.68 J8_SEG3.1 ; J6_SEG3.10@10616.77,12754.88 J6_SEG3.11@10754.57,12754.88
"CHAIN 2_SEG4": J6_SEG4.10 J6_SEG4.11 J7_SEG4.2 J8_SEG4.1 | length 1990.4
  Top Layer w10: J6_SEG4.10 12067.68,12749.22 11992.67,12674.21 11685.03,12674.21 11583.94,12775.3 11583.94,13303.56 11621.24,13340.87 11954.02,13340.87 J7_SEG4.2 12057.19,13238.68 12231.79,13238.68 J8_SEG4.1 ; J6_SEG4.10@12128.58,12754.88 J6_SEG4.11@12266.38,12754.88
"CHAIN 2_SEG5": J6_SEG5.10 J6_SEG5.11 J7_SEG5.2 J8_SEG5.1 | length 1953.2
  Top Layer w10: J6_SEG5.10 13579.49,12749.22 13504.48,12674.21 13196.84,12674.21 13095.75,12775.3 13095.75,13240.02 13196.6,13340.87 13465.83,13340.87 J7_SEG5.2 13569,13238.68 13743.6,13238.68 J8_SEG5.1 ; J6_SEG5.10@13640.39,12754.88 J6_SEG5.11@13778.19,12754.88
"CHAIN IN_SEG1": C1.2 D1.K J4.4 J5_SEG1.1 J6_SEG1.7 K1.2 K1.7 R6.2 U1.10 | length 11087.2
  Top Layer w10: J5_SEG1.1 7211.02,13167.32 7856.35,13167.32 7862.2,13173.18 7862.2,13312.99 7792.99,13382.2 7339.57,13382.2 ; J6_SEG1.7 7232.63,12749.22 7287,12803.59 7885.75,12803.59 7917.6,12771.74 7917.6,12689.25 7862.56,12634.21 7125.89,12634.21 7002.99,12757.11 7002.99,13320.13 7065.07,13382.2 7339.57,13382.2 ; D1.K 7368.62,13758.63 D1.K@7397.08,13730.16 ; D1.K@7352.87,13760.81 7288.66,13760.81 7270.65,13778.82 7270.65,13783.05 7260.65,13793.05 C1.2 7255.65,13848.27 7219.4,13884.51 7189.96,13855.07 7189.96,13683.07 7317.91,13555.12 7337.6,13555.12 ; 7493.11,14012.8 7493.11,13993.11 7504.61,13981.61 7564.43,13981.61 7588.58,13957.47 7588.58,13555.12 ; K1.7 11037.4,13991.14 10906.5,13991.14 10732.28,13816.93 K1.2 10388.78,13555.12 7588.58,13555.12 ; 7337.6,13555.12 7588.58,13555.12 ; 7337.6,13555.12 7337.6,13384.17 7339.57,13382.2
  Bottom Layer w10: K1.7 11233.99,13998.03 11311.98,14076.02 12167.56,14076.02 J4.4
"CHAIN IN_SEG2": J5_SEG2.1 J6_SEG1.12 J6_SEG2.7 J8_SEG1.2 | length 7367.1
  Top Layer w10: J8_SEG1.2 7668.31,13362.2 7073.35,13362.2 7022.99,13311.84 7022.99,12765.39 7134.17,12654.21 7768.22,12654.21 J6_SEG1.12 ; J5_SEG2.1 8728.7,13167.08 9374.02,13167.08 9379.88,13172.93 9379.88,13312.75 9310.67,13381.96 8582.75,13381.96 8520.67,13319.88 8520.67,12756.86 8643.57,12633.97 9380.24,12633.97 9435.28,12689 9435.28,12771.49 9403.43,12803.34 8804.67,12803.34 8750.3,12748.97 J6_SEG2.7
  Bottom Layer w10: J6_SEG1.12 7870.35,12756.34 8684.56,12756.34 J6_SEG2.7
"CHAIN IN_SEG3": J5_SEG3.1 J6_SEG2.12 J6_SEG3.7 J8_SEG2.2 | length 7351.2
  Top Layer w10: J8_SEG2.2 9185.98,13361.96 8591.03,13361.96 8540.67,13311.6 8540.67,12765.15 8651.85,12653.97 9285.9,12653.97 J6_SEG2.12 ; J5_SEG3.1 10240.16,13167.32 10878.67,13167.32 10884.53,13173.18 10884.53,13319.8 10822.13,13382.2 10094.2,13382.2 10032.13,13320.13 10032.13,12757.11 10155.02,12634.21 10891.69,12634.21 10946.73,12689.25 10946.73,12771.74 10914.88,12803.59 10316.13,12803.59 10261.76,12749.22 J6_SEG3.7
  Bottom Layer w10: J6_SEG2.12 9388.28,12756.34 10196.26,12756.34 J6_SEG3.7
"CHAIN IN_SEG4": J5_SEG4.1 J6_SEG3.12 J6_SEG4.7 J8_SEG3.2 | length 7359.8
  Top Layer w10: J8_SEG3.2 10697.44,13362.2 10102.49,13362.2 10052.13,13311.84 10052.13,12765.39 10163.31,12654.21 10797.36,12654.21 J6_SEG3.12 ; J5_SEG4.1 11751.97,13167.32 12396.39,13167.32 12402.24,13173.18 12402.24,13313.9 12333.94,13382.2 11606.01,13382.2 11543.94,13320.13 11543.94,12757.11 11666.83,12634.21 12403.5,12634.21 12458.54,12689.25 12458.54,12771.74 12426.69,12803.59 11827.94,12803.59 11773.57,12749.22 J6_SEG4.7
  Bottom Layer w10: J6_SEG3.12 10899.49,12756.34 11708.07,12756.34 J6_SEG4.7
"CHAIN IN_SEG5": J5_SEG5.1 J6_SEG4.12 J6_SEG5.7 J8_SEG4.2 | length 7318
  Top Layer w10: J8_SEG4.2 12209.25,13362.2 11614.3,13362.2 11563.94,13311.84 11563.94,12765.39 11675.12,12654.21 12309.17,12654.21 J6_SEG4.12 ; J5_SEG5.1 13263.78,13167.32 13904.94,13167.32 13910.8,13173.18 13910.8,13317.15 13845.75,13382.2 13181.37,13382.2 13055.75,13256.59 13055.75,12757.11 13178.65,12634.21 13915.32,12634.21 13970.35,12689.25 13970.35,12771.74 13938.5,12803.59 13339.75,12803.59 13285.38,12749.22 J6_SEG5.7
  Bottom Layer w10: J6_SEG4.12 12411.3,12756.34 13219.88,12756.34 J6_SEG5.7
"CHAIN OUT_SEG5": J4.7 J6_SEG5.12 J8_SEG5.2 J9.1 | length 4176
  Top Layer w10: J8_SEG5.2 13721.06,13362.2 13189.65,13362.2 13075.75,13248.3 13075.75,12765.39 13186.93,12654.21 13820.98,12654.21 J6_SEG5.12
  Bottom Layer w10: J4.7 13017.4,14379.25 13017.4,14065.87 13844.45,13238.82 14070.25,13238.82 J9.1
CLMODE: R8.2 U1.4 | length 118.6
  Top Layer w10: R8.2 7626.8,14131.57 7640.51,14117.86 7653.93,14117.86 7670.28,14101.51 7670.28,14073.82
DAC1: J6_SEG1.1 R18_SEG1.1 R21_DAC0.1 | length 968.8
  Top Layer w10: J6_SEG1.1 7174.25,13004.25 R18_SEG1.1
  Bottom Layer w10: J6_SEG1.1 7235.16,12887.01 7366.84,13018.7 7966.54,13018.7
DAC2: J6_SEG1.3 R19_SEG1.1 R22_DAC0.1 | length 764.1
  Top Layer w10: J6_SEG1.3@7447.49,12890.32 J6_SEG1.3@7449.84,12892.68 ; J6_SEG1.3 J6_SEG1.3@7449.84,12892.68 ; R19_SEG1.1 7449.84,13003.53 J6_SEG1.3@7449.84,12892.68
  Bottom Layer w10: J6_SEG1.3 7510.75,12887.01 7614.87,12991.14 8046.26,12991.14
DAC3: J6_SEG1.5 R20_SEG1.1 R23_DAC0.1 | length 550.9
  Top Layer w10: J6_SEG1.5@7723.08,12890.32 J6_SEG1.5@7725.43,12892.68 ; J6_SEG1.5 J6_SEG1.5@7725.43,12892.68 ; R20_SEG1.1 7725.43,13003.53 J6_SEG1.5@7725.43,12892.68
  Bottom Layer w10: J6_SEG1.5 7786.34,12887.01 7857.98,12958.66 8122.05,12958.66
DAC4: J6_SEG2.1 R18_SEG2.1 R25_DAC0.1 | length 647.6
  Top Layer w10: J6_SEG2.1 8691.93,13004.01 R18_SEG2.1
  Bottom Layer w10: 8196.85,12960.63 8270.71,12886.77 J6_SEG2.1
DAC5: J6_SEG2.3 R19_SEG2.1 R21_DAC1.1 | length 745.1
  Top Layer w10: J6_SEG2.3@8965.17,12890.08 J6_SEG2.3@8967.52,12892.43 ; J6_SEG2.3 J6_SEG2.3@8967.52,12892.43 ; R19_SEG2.1 8967.52,13003.28 J6_SEG2.3@8967.52,12892.43 ; 9473.43,13155.51 9475.62,13157.7 R21_DAC1.1
  Bottom Layer w10: J6_SEG2.3 9108.31,13027.56 9473.43,13027.56
DAC6: J6_SEG2.5 R20_SEG2.1 R22_DAC1.1 | length 524.7
  Top Layer w10: J6_SEG2.5@9240.76,12890.08 J6_SEG2.5@9243.11,12892.43 ; J6_SEG2.5 J6_SEG2.5@9243.11,12892.43 ; R20_SEG2.1 9243.11,13003.28 J6_SEG2.5@9243.11,12892.43 ; R22_DAC1.1 9553.63,13165.86 9554.13,13165.35
  Bottom Layer w10: J6_SEG2.5 9304.01,12886.77 9413.31,12996.06 9552.17,12996.06
DAC7: J6_SEG3.1 R18_SEG3.1 R23_DAC1.1 | length 751.4
  Top Layer w10: 9630.91,13157.48 9631.64,13158.21 R23_DAC1.1 ; J6_SEG3.1 10203.39,13004.25 R18_SEG3.1
  Bottom Layer w10: 9627.95,12887.8 10202.6,12887.8 J6_SEG3.1
DAC8: J6_SEG3.3 R19_SEG3.1 R25_DAC1.1 | length 969.5
  Top Layer w10: 9708.66,13159.45 9709.65,13160.43 R25_DAC1.1 ; J6_SEG3.3@10476.62,12890.32 J6_SEG3.3@10478.98,12892.68 ; J6_SEG3.3 J6_SEG3.3@10478.98,12892.68 ; R19_SEG3.1 10478.98,13003.53 J6_SEG3.3@10478.98,12892.68
  Bottom Layer w10: 9708.66,12941.93 10363.16,12941.93 10418.07,12887.01 J6_SEG3.3
DAC9: J6_SEG3.5 R20_SEG3.1 R21_DAC2.1 | length 473.3
  Top Layer w10: J6_SEG3.5@10752.21,12890.32 J6_SEG3.5@10754.57,12892.68 ; J6_SEG3.5 J6_SEG3.5@10754.57,12892.68 ; R20_SEG3.1 10754.57,13003.53 J6_SEG3.5@10754.57,12892.68 ; 10987.2,13157.48 10988.41,13158.69 R21_DAC2.1
  Bottom Layer w10: J6_SEG3.5 10810.41,12887.01 10950.95,13027.56 10988.19,13027.56
DAC10: J6_SEG4.1 R18_SEG4.1 R22_DAC2.1 | length 853.6
  Top Layer w10: R22_DAC2.1 11066.42,13162.91 11066.93,13162.4 ; J6_SEG4.1 11715.2,13004.25 R18_SEG4.1
  Bottom Layer w10: 11066.93,12963.58 11143.5,12887.01 J6_SEG4.1
DAC11: J6_SEG4.3 R19_SEG4.1 R23_DAC2.1 | length 1050.8
  Top Layer w10: 11142.72,13161.42 11144.43,13163.13 R23_DAC2.1 ; J6_SEG4.3@11988.43,12890.32 J6_SEG4.3@11990.79,12892.68 ; J6_SEG4.3 J6_SEG4.3@11990.79,12892.68 ; R19_SEG4.1 11990.79,13003.53 J6_SEG4.3@11990.79,12892.68
  Bottom Layer w10: 11143.7,12949.8 11867.09,12949.8 11929.88,12887.01 J6_SEG4.3
DAC12: J6_SEG4.5 R20_SEG4.1 R25_DAC2.1 | length 1367.5
  Top Layer w10: R25_DAC2.1 11222.44,13163.39 11223.43,13162.4 ; J6_SEG4.5@12264.02,12890.32 J6_SEG4.5@12266.38,12892.68 ; J6_SEG4.5 J6_SEG4.5@12266.38,12892.68 ; R20_SEG4.1 12266.38,13003.53 J6_SEG4.5@12266.38,12892.68
  Bottom Layer w10: 11224.41,12981.3 11226.38,12983.27 11533.46,12983.27 11664.37,13114.17 11978.31,13114.17 12205.47,12887.01 J6_SEG4.5
DAC13: J6_SEG5.1 R18_SEG5.1 R21_DAC3.1 | length 953
  Top Layer w10: 12501.97,13156.5 12503.94,13158.46 R21_DAC3.1 ; J6_SEG5.1 13227.01,13004.25 R18_SEG5.1
  Bottom Layer w10: 12503.94,13001.97 12618.89,12887.01 J6_SEG5.1
DAC14: J6_SEG5.3 R19_SEG5.1 R22_DAC3.1 | length 1155.5
  Top Layer w10: R22_DAC3.1 12581.95,13157.23 12582.68,13156.5 ; J6_SEG5.3@13500.25,12890.32 J6_SEG5.3@13502.6,12892.68 ; J6_SEG5.3 J6_SEG5.3@13502.6,12892.68 ; R19_SEG5.1 13502.6,13003.53 J6_SEG5.3@13502.6,12892.68
  Bottom Layer w10: 12587.6,13020.67 12587.6,13019.58 12665.79,12941.38 13387.32,12941.38 13441.69,12887.01 J6_SEG5.3
DAC15: J6_SEG5.5 R20_SEG5.1 R23_DAC3.1 | length 1463.1
  Top Layer w10: R23_DAC3.1 12659.96,13155.99 12660.43,13155.51 ; J6_SEG5.5@13775.84,12890.32 J6_SEG5.5@13778.19,12892.68 ; J6_SEG5.5 J6_SEG5.5@13778.19,12892.68 ; R20_SEG5.1 13778.19,13003.53 J6_SEG5.5@13778.19,12892.68
  Bottom Layer w10: 12668.31,13006.89 12688.98,12986.22 13042.32,12986.22 13185.04,13128.94 13475.36,13128.94 13717.28,12887.01 J6_SEG5.5
DAC16: J4.1 R15.1 R25_DAC3.1 | length 5359.6
  Top Layer w10: 12738.19,13157.48 12737.97,13157.7 R25_DAC3.1 12742.97,13216.07 12862.48,13335.58 13015.43,13335.58 13015.43,13336.38 13101.26,13422.2 13862.32,13422.2 13867.2,13417.32 13882.87,13417.32 13975.39,13324.8 13975.39,13130.86 13981.25,13125 14103.26,13125 14139.31,13088.95 14139.31,13065.24 ; J4.1 13015.75,14510.83 13015.75,14752.95 13054.13,14791.34 14233.32,14791.34 14259.17,14765.48 14259.17,13161.38 14163.02,13065.24 14139.31,13065.24 ; R15.1 14106.76,13012.87 14126.63,13032.74 14130.52,13032.74 14139.31,13041.52 14139.31,13065.24
FLAG: DS2.2 U1.6 | length 93.5
  Top Layer w10: DS2.2 7444.63,14085.38 7454.72,14095.47 7496.06,14095.47
GND: C1.1 C2.1 C3.2 C4.1 D1.A D4.A DS3.2 DS4.2 DS5.2 DS6.2 J1.3 J1.6 J1.9 J1.12 J2.3 J2.6 J2.9 J2.12 J3.3 J3.4 J3.7 J3.9 J3.10 J4.2 J4.10 J4.12 J6_SEG1.2 J6_SEG1.4 J6_SEG1.6 J6_SEG2.2 J6_SEG2.4 J6_SEG2.6 J6_SEG3.2 J6_SEG3.4 J6_SEG3.6 J6_SEG4.2 J6_SEG4.4 J6_SEG4.6 J6_SEG5.2 J6_SEG5.4 J6_SEG5.6 K1.3 K1.5 K1.6 Q1.S R7.2 R8.1 R9.1 R10.1 R24_DAC0.1 R24_DAC1.1 R24_DAC2.1 R24_DAC3.1 U1.9 U1.11 U2.3 | length 21310.4
  Top Layer w10: J1.6 J1.12 7236.83,14521.4 7291.2,14575.77 7534.94,14575.77 J1.9 ; C1.1 7260.65,13730.58 7317.01,13674.21 7456.69,13674.21 ; J6_SEG1.2 7372.95,12887.01 7427.32,12832.64 7533.27,12832.64 J6_SEG1.4 7648.54,12887.01 7702.91,12832.64 7808.86,12832.64 J6_SEG1.6 ; DS4.2 7495.51,13890.49 7518.62,13867.39 R7.2@7520.35,13867.39 ; DS3.2 7554.32,14180.85 R8.1@7564.32,14170.85 ; 7458.66,13648.62 7456.69,13650.59 7456.69,13674.21 ; 7494.09,14034.13 7482.69,14034.13 7469.49,14020.93 7469.49,13981.3 7489.17,13961.61 7556.15,13961.61 7562.01,13955.76 7562.01,13900.77 7528.62,13867.39 R7.2 R7.2@7520.35,13867.39 ; R8.1 R8.1@7564.32,14170.85 ; J1.3 J1.9 ; C3.2 7708.15,13855.85 7778.54,13926.24 7778.54,13937.99 ; R10.1 7764.81,14172.29 7722.53,14214.57 7570.18,14214.57 7564.32,14208.71 R8.1@7564.32,14170.85 ; C4.1 7772.38,13641.3 7782.56,13651.48 7782.56,13672.78 U2.3 7829.3,13679.59 ; 7794.65,13938.98 7793.66,13937.99 7778.54,13937.99 ; C2.1 7850.31,14020.66 7840.21,14010.55 R9.1 7778.54,13937.99 ; Q1.S 7851.69,13701.97 7829.3,13679.59 ; 8019.69,13354.33 8020.41,13353.61 R24_DAC0.1 ; D4.A 8104.33,13708.05 8075.87,13679.59 7829.3,13679.59 ; J2.6 J2.12 8831.57,14522.64 8885.94,14577.01 9129.68,14577.01 J2.9 J2.3 9277.56,14291.34 9634.84,14291.34 9642.72,14299.21 9642.72,14498.03 9383.86,14756.89 7885.7,14756.89 7650.21,14521.4 J1.9 ; J6_SEG2.2 8890.63,12886.77 8945,12832.4 9050.94,12832.4 J6_SEG2.4 9166.22,12886.77 9220.59,12832.4 9326.53,12832.4 J6_SEG2.6 ; 9532.95,13340.55 R24_DAC1.1 ; J6_SEG3.2 10402.09,12887.01 10456.46,12832.64 10562.4,12832.64 J6_SEG3.4 10677.68,12887.01 10732.05,12832.64 10837.99,12832.64 J6_SEG3.6 ; 11058.07,13352.36 11066.93,13343.5 R24_DAC2.1 ; J6_SEG4.2 11913.9,12887.01 11968.27,12832.64 12074.21,12832.64 J6_SEG4.4 12189.49,12887.01 12243.86,12832.64 12349.8,12832.64 J6_SEG4.6 ; 12562.01,13345.47 12562.27,13345.73 R24_DAC3.1 ; J6_SEG5.2 13425.71,12887.01 13480.08,12832.64 13586.02,12832.64 J6_SEG5.4 13701.3,12887.01 13755.67,12832.64 13861.61,12832.64 J6_SEG5.6 ; DS6.2 13416.32,14236.67 13416.32,14113.72 DS5.2 13455.71,14074.33 13455.71,13748.03 13528.78,13674.96 13948.58,13674.96 J3.7 ; 7456.69,13674.21 7491.14,13674.21 7510.35,13693.42 D1.A 7510.35,13857.39 R7.2@7520.35,13867.39
  Bottom Layer w10: J1.6 6855.31,14063 6855.31,12838.5 6861.17,12832.64 7257.68,12832.64 J6_SEG1.2 ; 7587.6,14250 7587.6,14381.9 J1.3 ; J2.3 9570.87,13998.03 K1.5 K1.6 10831.69,13816.93 K1.3 11327.69,13816.93 11430.8,13920.04 12287.17,13920.04 J4.2 12683.19,14376.97 12614.29,14445.87 12537.4,14445.87 J4.10 12414.13,14460.39 12308.19,14460.39 12253.82,14514.76 J4.12 ; J6_SEG4.6 12590.61,12887.01 12630.61,12847.01 12848.97,12847.01 12863.34,12832.64 13310.43,12832.64 J6_SEG5.2 ; J3.4 J3.10 J3.9 J3.3 13865.16,13944.02 13934.06,13875.12 13934.06,13798.23 J3.7 14268.7,13463.58 14268.7,12947.83 14207.88,12887.01 J6_SEG5.6
NetC4_2: C4.2 R16.1 U2.2 | length 207.4
  Top Layer w10: R16.1 7650.67,13711.35 7660.67,13701.35 7660.67,13680.78 7696.54,13644.91 7704.05,13644.91 7709.91,13639.05 7709.91,13637.53 ; C4.2 7709.91,13637.53 ; U2.2 7745.16,13672.78 7745.16,13657.47 7732.59,13644.91 7717.28,13644.91 7709.91,13637.53
NetD2_A: D2.A D3.A | length 129.5
  Top Layer w10: D3.A 8092.89,14028.07 D2.A
NetDS1_1: DS1.1 R1.1 | length 64.3
  Top Layer w10: R1.1 DS1.1
NetDS2_1: DS2.1 R2.1 | length 65.2
  Top Layer w10: R2.1 7282.94,14085.38 DS2.1
NetDS3_1: DS3.1 R3.1 | length 64.6
  Top Layer w10: R3.1 7345.5,14180.12 DS3.1
NetDS4_1: DS4.1 R6.1 | length 64.7
  Top Layer w10: R6.1 7282.86,13890.49 DS4.1
NetDS5_1: DS5.1 R11.1 | length 70.2
  Top Layer w10: DS5.1 13517.97,14141.22 R11.1
NetDS6_1: DS6.1 R12.1 | length 69.5
  Top Layer w10: DS6.1 13517.58,14210.16 R12.1
NetDS7_2: DS7.2 R15.2 | length 58.4
  Top Layer w10: R15.2 14046.81,13010.39 DS7.2
NetDS8_SEG1_2: DS8_SEG1.2 R18_SEG1.2
NetDS8_SEG2_2: DS8_SEG2.2 R18_SEG2.2
NetDS8_SEG3_2: DS8_SEG3.2 R18_SEG3.2
NetDS8_SEG4_2: DS8_SEG4.2 R18_SEG4.2
NetDS8_SEG5_2: DS8_SEG5.2 R18_SEG5.2
NetDS9_SEG1_2: DS9_SEG1.2 R19_SEG1.2
NetDS9_SEG2_2: DS9_SEG2.2 R19_SEG2.2
NetDS9_SEG3_2: DS9_SEG3.2 R19_SEG3.2
NetDS9_SEG4_2: DS9_SEG4.2 R19_SEG4.2
NetDS9_SEG5_2: DS9_SEG5.2 R19_SEG5.2
NetDS10_SEG1_2: DS10_SEG1.2 R20_SEG1.2
NetDS10_SEG2_2: DS10_SEG2.2 R20_SEG2.2
NetDS10_SEG3_2: DS10_SEG3.2 R20_SEG3.2
NetDS10_SEG4_2: DS10_SEG4.2 R20_SEG4.2
NetDS10_SEG5_2: DS10_SEG5.2 R20_SEG5.2
NetQ1_G: Q1.G R17.2 | length 81.4
  Top Layer w10: R17.2 7851.12,13846.38 7867.44,13830.06 Q1.G
NetR17_1: R17.1 U2.4 | length 77.6
  Top Layer w10: R17.1 7789.37,13850.65 U2.4
OVLO: R5.1 R10.2 U1.3 | length 148.8
  Top Layer w10: 7669.29,14053.15 7685.65,14053.15 7716.06,14083.56 R5.1 7716.06,14093.56 7702.34,14107.29 R10.2
SETI: R7.1 U1.8 | length 204.1
  Top Layer w10: 7495.08,14054.13 7474.41,14054.13 7449.49,14029.21 7449.49,13973.01 7482.65,13939.86 7513.62,13939.86 R7.1
"SHDN 16 OUT": D2.K J4.8 J9.2 K1.13 | length 7232.9
  Top Layer w10: D2.K 8266.79,14028.75 8295.25,14057.21 8295.25,14242.11 8321.54,14268.39 10009.53,14268.39 K1.13 10539.37,14798.23 12460.63,14798.23 J4.8
  Bottom Layer w10: J4.8 12805,14514.76 12861.1,14570.87 12912.45,14570.87 13044.95,14438.37 13044.95,14107.61 13831.69,13320.87 14088.2,13320.87 J9.2
"SHDN HI": K1.10 R13.1 | length 1264.4
  Top Layer w10: K1.10 10728.58,14312.24 11470.3,14312.24 11540.42,14242.13 R13.1
"SHDN HI LED": J4.11 R13.2 | length 578.9
  Top Layer w10: R13.2 12145.67,14242.13 12259.84,14356.3 12259.84,14443.9 J4.11
"SHDN LO": K1.11 R14.1 | length 845.6
  Top Layer w10: K1.11 11122.28,14156.26 11621.58,14156.26 11628.7,14163.39 R14.1
"SHDN LO LED": J4.5 R14.2 | length 502.1
  Top Layer w10: R14.2 12117.13,14163.39 J4.5
"SHDN STAT": D3.K D4.K J4.6 K1.9 K1.14 Q1.D | length 5087.4
  Top Layer w10: Q1.D 7964.32,13741.77 D3.K 8103.86,13870.59 D4.K 8104.33,13886.81 8132.8,13915.28 8306.02,13915.28 8354.33,13963.58 8354.33,14219.54 8369.05,14234.25 K1.9 10548.23,14525.59 10548.23,14688.04 10554.09,14693.9 11259.84,14693.9 K1.14 11446.1,14507.64 12062.24,14507.64 J4.6
UVLO: R4.1 R9.2 U1.2 | length 143.3
  Top Layer w10: 7670.28,14032.48 7677.2,14025.55 7706.06,14025.55 7716.06,14015.55 R9.2 7716.06,13938.15 R4.1
UVOV: DS1.2 U1.7 | length 144.8
  Top Layer w10: DS1.2 7406.15,14016.38 7465.24,14075.47 7496.06,14075.47
pads on no net: J1.NC J2.NC J3.NC J4.NC J6_SEG1.NC J6_SEG2.NC J6_SEG3.NC J6_SEG4.NC J6_SEG5.NC K1.1 K1.4 U1.5 U2.1
copper on no net: | length 4094.4
  Top Layer w10: 7491.14,14200.85 7491.14,14246.06 v1(7493.11,14248.03) ; v1(7966.54,13115.16) 7967.52,13116.14 7967.52,13167.32 ; v1(8044.29,13115.16) 8046.26,13117.13 8046.26,13167.32 ; v1(8122.05,13115.16) 8124.02,13117.13 8124.02,13167.32 ; 8197.83,13169.29 8197.83,13117.13 v1(8199.8,13115.16)
  Bottom Layer w10: 7071.85,14246.06 7491.14,14246.06 v1(7493.11,14248.03) 7497.05,14251.97 7567.6,14251.97 ; v1(7455.71,13602.36) 7454.72,13601.38 7454.72,13459.6 7460.58,13453.74 7937.01,13453.74 7939.96,13456.69 ; v1(7834.65,13937.01) 7834.65,13607.28 7963.58,13478.35 ; 7963.58,13437.01 7963.58,13359.25 v1(7965.55,13357.28) ; 8831.69,12996.06 8831.69,13132.92 8837.55,13138.78 9116.14,13138.78 9120.08,13142.72 9122.05,13144.68 9122.05,13311.02 9154.53,13343.5 v1(9473.43,13343.5) ; 10619.09,12976.38 10619.09,13112.25 10624.95,13118.11 10904.58,13118.11 10910.43,13123.97 10910.43,13268.7 v1(10987.2,13345.47) ; 12399.61,12982.28 12399.61,13109.25 12499.02,13208.66 v1(12499.02,13346.46) ; v1(13681.1,14413.39) 13737.2,14413.39
  other v1: 9467.52,13115.16 9549.21,13115.16 9630.91,13115.16 9712.6,13115.16 10990.16,13115.16 11069.23,13115.16 11148.29,13115.16 11227.36,13115.16 12504.92,13115.16 12584.65,13115.16 12664.37,13115.16 12744.09,13115.16

## Silkscreen, mask and mechanical layers (free items; w line width, h text height)
Top Overlay:
  text "5V" at 13288.54,14212.76 h60
  text "12V IN" at 6839.46,14144.59 h60
  text "VCU" at 13241.3,14082.83 h60
  text "FLAG" at 6939.86,14047.8 h60
  text "UVOV" at 6939.86,13951.02 h60
  text "12V PWR" at 6769.91,13854.23 h60
  text "01" at 7084.21,13100.55 h60
  text "02" at 7359.8,13100.55 h60
  text "03" at 7635.39,13100.55 h60
  text "16" at 14031.09,13100.83 h60

## Text inside footprints (layer, text, board x,y; h text height)
J1: Top Overlay "1" at 7963.16,14412.97 h60 r180; Top Overlay "7" at 7971.04,14550.77 h60 r180; Top Overlay "6" at 7104.9,14409.04 h60 r180; Top Overlay "12" at 7128.52,14550.77 h60 r180
J2: Top Overlay "1" at 9557.91,14414.21 h60 r180; Top Overlay "7" at 9565.79,14552.01 h60 r180; Top Overlay "6" at 8699.65,14410.28 h60 r180; Top Overlay "12" at 8723.27,14552.01 h60 r180
J3: Top Overlay "1" at 13894.53,13631.06 h60 r90; Top Overlay "7" at 14032.32,13623.19 h60 r90; Top Overlay "6" at 13890.59,14489.33 h60 r90; Top Overlay "12" at 14032.32,14465.71 h60 r90
J4: Top Overlay "1" at 12980.16,14406.34 h60 r180; Top Overlay "7" at 12988.03,14544.13 h60 r180; Top Overlay "6" at 12121.89,14402.4 h60 r180; Top Overlay "12" at 12145.51,14544.13 h60 r180
J6_SEG1: Top Overlay "1" at 7075.98,12857.64 h60; Top Overlay "7" at 7068.11,12719.85 h60; Top Overlay "6" at 7934.25,12861.58 h60; Top Overlay "12" at 7910.63,12719.85 h60
J6_SEG2: Top Overlay "12" at 9428.31,12719.6 h60; Top Overlay "6" at 9451.93,12861.33 h60; Top Overlay "7" at 8585.79,12719.6 h60; Top Overlay "1" at 8593.66,12857.4 h60
J6_SEG3: Top Overlay "12" at 10939.76,12719.85 h60; Top Overlay "6" at 10963.39,12861.58 h60; Top Overlay "7" at 10097.24,12719.85 h60; Top Overlay "1" at 10105.12,12857.64 h60
J6_SEG4: Top Overlay "12" at 12451.57,12719.85 h60; Top Overlay "6" at 12475.2,12861.58 h60; Top Overlay "7" at 11609.06,12719.85 h60; Top Overlay "1" at 11616.93,12857.64 h60
J6_SEG5: Top Overlay "12" at 13963.39,12719.85 h60; Top Overlay "6" at 13987.01,12861.58 h60; Top Overlay "7" at 13120.87,12719.85 h60; Top Overlay "1" at 13128.74,12857.64 h60